# Altium PCB RFM232_V02.PcbDoc
Units mm, origin at the board's own origin, x right, y up, seen from the top; angles counter-clockwise.
Board outline 55.25 x 18.25 mm, 2 copper layers (Top Layer, Bottom Layer); 16 components, 20 nets, 75 pads, 20 vias.
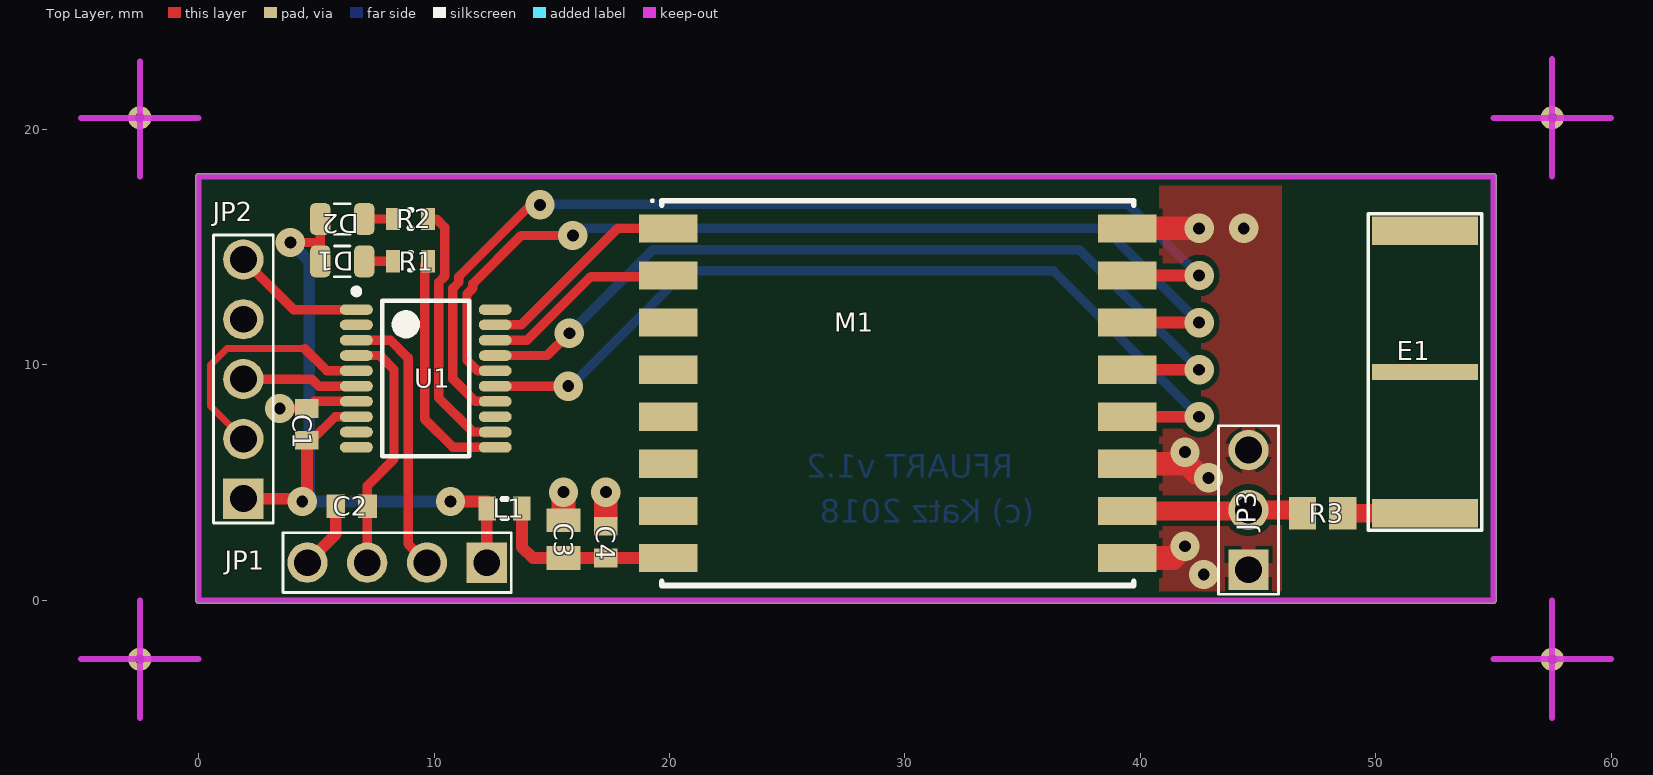
[diagram p0: Top Layer view]
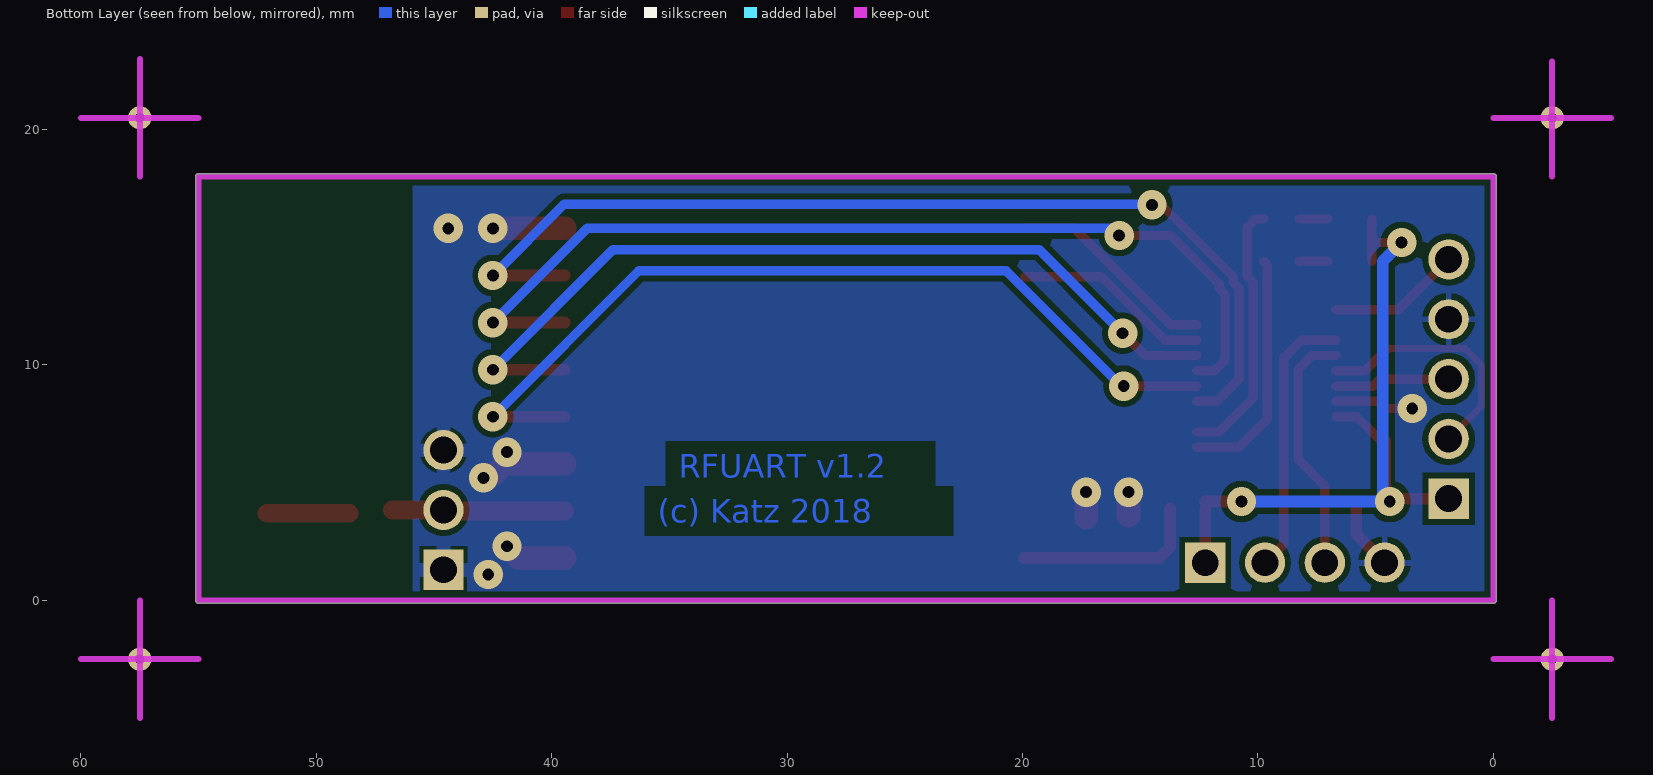
[diagram p1: Bottom Layer view, seen from below]

## Layer stack, top to bottom
Top Solder: solder mask 0.0102, Solder Resist, Dk 3.5
Top Layer: signal copper 0.0356
Dielectric 1: dielectric 0.32, FR-4, Dk 4.8
Bottom Layer: signal copper 0.0356
Bottom Solder: solder mask 0.0102, Solder Resist, Dk 3.5

## Board outline
0,-0.125 cw(c0,0) -0.125,0 -0.125,18 cw(c0,18) 0,18.125 55,18.125 cw(c55,18) 55.125,18 55.125,0 cw(c55,0) 55,-0.125

## Design rules (kind name [scope] priority, off if disabled: settings)
Clearance Clearance_4 [InNamedPolygon('JP21B') vs InNet('NetJP3_2')] p1: gap=0.25 ignorepadtopadclearanceinfootprint=FALSE
Clearance Clearance_3 [InNamedPolygon('JP21B')] p2: gap=0.254 ignorepadtopadclearanceinfootprint=FALSE except(0: Arc-Hole Track-Hole SMDPad-Hole THPad-Hole Via-Hole Fill-Hole Poly-Hole Region-Hole Text-Hole)
Clearance Clearance_2 [All vs InComponent('U1')] p3: gap=0.15 ignorepadtopadclearanceinfootprint=FALSE
Clearance Clearance_1 [InNamedPolygon('GND-T1') Or  InNamedPolygon('GND-B1')] p4: gap=0.25 ignorepadtopadclearanceinfootprint=FALSE
Clearance [All] p5: gap=0.2 ignorepadtopadclearanceinfootprint=FALSE
MinimumSolderMaskSliver [All] p1: minsoldermaskwidth=0.02
PolygonConnect PolygonConnect_1 [InComponent('JP3') vs IsNamedPolygon('JP21B') Or  IsNamedPolygon('JP21B')] p1: connectstyle=Relief reliefconductorwidth=0.6 reliefentries=4 polygonreliefangle="90 Angle" airgapwidth=0.15
PolygonConnect PolygonConnect_4 [IsVia vs IsNamedPolygon('JP21B')] p2: connectstyle=Direct reliefconductorwidth=0.254 reliefentries=4 polygonreliefangle="90 Angle" airgapwidth=0.254
PolygonConnect [All] p3: connectstyle=Relief reliefconductorwidth=0.254 reliefentries=4 polygonreliefangle="90 Angle" airgapwidth=0.254
RoutingVias [All] p1: holewidth=0.4 width=0.8 viastyle="Through Hole" minholewidth=0.711 minwidth=1.27 maxholewidth=0.711 maxwidth=1.27
SilkToSilkClearance [All] p1: silktosilkclearance=0.02
SilkToSolderMaskClearance [IsPad] p1: minsilkscreentomaskgap=0 clearancetoexposedcopper=TRUE
SolderMaskExpansion [All] p1: expansion=0.102
Width [All] p1: maxlimit=2 minlimit=0.2 preferedwidth=0.3
27 further rules are at their usual default settings.

## Components (designator, comment, footprint, x,y, rotation, side; value= is the part's Value field where it differs from the comment)
C1 "100n" CAPC1608X08N 4.6,7.475 r90 top
C2 "100n" CAPC1608X08N 6.5,4 r180 top
C3 "4u7" CAPC2012X11N 15.5,2.6 r90 top
C4 "100n" CAPC1608X08N 17.3,2.475 r90 top
D1 "GREEN" LEDC200X125X80L40N 6.1,14.4 r180 top
D2 "GREEN" LEDC200X125X80L40N 6.1,16.2 r180 top
E1 "C812D5" C812D5 52.1,9.7 r90 top
JP1 "nc" HDRV4W70P254_4X1_889X254H754 12.24,1.6 r180 top
JP2 "Header 5" HDRV5W70P254_5X1_1143X254H754 1.9,4.32 r90 top
JP3 "Header 3" HDRV3W70P254_3X1_635X254H754 44.6,1.3 r90 top
L1 "BLM18AG601" INDC1608X10N 13,3.9 r0 top
M1 "RFM69HW" LGA16_RFM69 29.7,8.8 r0 top
R1 "1k" RESC1608X06N 9,14.4 r0 top
R2 "1k" RESC1608X06N 9,16.2 r0 top
R3 "0" RESC2012X07N 47.75,3.7 r0 top
U1 "STM8L051F3P6" TSOP65P640X110-20N 9.65,9.425 r0 top

## Footprints (in the part's own frame and the unit in brackets; to place one, negate y for a bottom-side part, rotate by r counter-clockwise, add the part's x,y. Pads: shape width x height; smd on the part's side, far side on the other; paste and mask are expansions set on the pad)
C812D5 [mm]
  rect 1.2x4.5 smd: 1(-6,0) 2(6,0)
  rect 0.7x4.5 smd: 3(0,0)
  silkscreen extent -6.73,-2.41 6.73,2.41, body extent -6.73,-2.41 6.73,2.41, height 1.8
CAPC1608X08N [mm] "Chip Capacitor, 2-Leads, Body 1,60x0,80mm, IPC Medium Density"
  rect 0.8x1 smd: 1(-0.675,0) 2(0.675,0)
  body extent -0.87,-0.48 0.87,0.47, height 0.85
CAPC2012X11N [mm] "Chip Capacitor, 2-Leads, Body 2,00x1,25mm, IPC Medium Density"
  rect 1x1.45 smd: 1(-0.8,0) 2(0.8,0)
  body extent -1.1,-0.72 1.1,0.72, height 1.1
HDRV3W70P254_3X1_635X254H754 [mm] "Header, Vertical, 2.54 mm pitch; 0.70 mm lead width, 3 pins, 1 row, 3 pins per row, 6.35 mm L X 2.54 mm W X 7.54 mm H body"
  rect 1.71x1.71 hole 1.14 paste-1.71: 1(0,0)
  round 1.71 hole 1.14 paste-1.71: 2(2.54,0) 3(5.08,0)
  silkscreen extent -1.04,-1.27 6.12,1.27, body extent -0.64,-1.27 5.71,1.27, height 7.54
HDRV4W70P254_4X1_889X254H754 [mm] "Header, Vertical, 2.54 mm pitch; 0.70 mm lead width, 4 pins, 1 row, 4 pins per row, 8.89 mm L X 2.54 mm W X 7.54 mm H body"
  rect 1.71x1.71 hole 1.14 paste-1.71: 1(0,0)
  round 1.71 hole 1.14 paste-1.71: 2(2.54,0) 3(5.08,0) 4(7.62,0)
  silkscreen extent -1.04,-1.27 8.66,1.27, body extent -0.64,-1.27 8.25,1.27, height 7.54
HDRV5W70P254_5X1_1143X254H754 [mm] "Header, Vertical, 2.54 mm pitch; 0.70 mm lead width, 5 pins, 1 row, 5 pins per row, 11.43 mm L X 2.54 mm W X 7.54 mm H body"
  rect 1.71x1.71 hole 1.14 paste-1.71: 1(0,0)
  round 1.71 hole 1.14 paste-1.71: 2(2.54,0) 3(5.08,0) 4(7.62,0) 5(10.16,0)
  silkscreen extent -1.04,-1.27 11.2,1.27, body extent -0.64,-1.27 10.79,1.27, height 7.54
INDC1608X10N [mm] "Chip Inductor, 2-Leads, Body 1,60x0,80mm, IPC Medium Density"
  rect 0.74x1.02 smd: 1(-0.735,0) 2(0.735,0)
  silkscreen extent -0.1,-0.41 0.1,0.41, body extent -0.9,-0.5 0.9,0.5, height 1
LEDC200X125X80L40N [mm] "LED, Chip; 2.00 mm L X 1.25 mm W X 0.80 mm H body"
  rrect51% 0.86x1.35 smd: A(0.935,0) K(-0.935,0)
  silkscreen extent -0.33,-0.65 0.33,0.65, body extent -1,-0.63 1,0.63, height 0.25
LGA16_RFM69 [mm] "LGA, 16-Leads, RFM69HW"
  rect 2.5x1.2 smd: 1(-9.75,7) 2(-9.75,5) 3(-9.75,3) 4(-9.75,1) 5(-9.75,-1) 6(-9.75,-3) 7(-9.75,-5) 8(-9.75,-7) 9(9.75,-7) 10(9.75,-5) 11(9.75,-3) 12(9.75,-1) 13(9.75,1) 14(9.75,3) 15(9.75,5) 16(9.75,7)
  silkscreen extent -10.47,-8.17 10.02,8.22, body extent -9.87,-8.03 9.87,8.03, height 2
RESC1608X06N [mm] "Chip Resistor, 2-Leads, Body 1,60x0,82mm, IPC Medium Density"
  rect 0.6x0.95 smd: 1(-0.75,0) 2(0.75,0)
  silkscreen extent -0.05,-0.38 0.05,0.38, body extent -0.85,-0.48 0.85,0.48, height 0.6
RESC2012X07N [mm] "Chip Resistor, 2-Leads, Body 2,00x1,25mm, IPC Medium Density"
  rect 1.15x1.4 smd: 1(-0.85,0) 2(0.85,0)
  body extent -1.08,-0.7 1.07,0.7, height 0.65
TSOP65P640X110-20N [mm] "TSOP, 20-Leads, Body 6,50x4,40mm, Pitch 0,65mm, IPC Medium Density"
  oval 1.4x0.45 smd: 1(-2.95,2.925) 2(-2.95,2.275) 3(-2.95,1.625) 4(-2.95,0.975) 5(-2.95,0.325) 6(-2.95,-0.325) 7(-2.95,-0.975) 8(-2.95,-1.625) 9(-2.95,-2.275) 10(-2.95,-2.925) 11(2.95,-2.925) 12(2.95,-2.275) 13(2.95,-1.625) 14(2.95,-0.975) 15(2.95,-0.325) 16(2.95,0.325) 17(2.95,0.975) 18(2.95,1.625) 19(2.95,2.275) 20(2.95,2.925)
  silkscreen extent -3.07,-3.3 1.85,3.82, body extent -2.25,-3.3 2.25,3.3, height 1.1

## Part data
C1 C2 C3 C4: library part CAPN
D1 D2: library part DLED
JP1: library part "HEADER 4", "4 Pin Header 2,0 mm, 1x04", Part Field 1=CviLux
JP2: "Header, 5-Pin", LatestRevisionDate=17-Jul-2002, LatestRevisionNote="Re-released for DXP Platform.", Publisher="Altium Limited"
JP3: "Header, 3-Pin", LatestRevisionDate=17-Jul-2002, LatestRevisionNote="Re-released for DXP Platform.", Publisher="Altium Limited"
L1: library part SUPRESOR
M1: library part RFM69HW_V13_2
R1 R2 R3: library part RES

## Free pads (board coordinates)
  round 1 hole 0.4: 2(-2.5,-2.5) 3(57.5,20.5) 4(-2.5,20.5) 5(57.5,-2.5)

## Via types
v1: diameter 1.25, hole 0.5, Top Layer to Bottom Layer, 20 vias

## Nets (pads, with @x,y where several pads share a name; then routed paths per layer and width w, separated by ;. In a path a pad name is that pad's centre, name@x,y a point inside that pad or via, vN(x,y) a via of type N, cw(c..) or ccw(c..) an arc to the next point about the centre after c; other vN are vias at no path point)
GND: C1.2 C2.2 C3.2 C4.2 JP1.4 JP2.4 JP3.1 JP3.3 M1.9 M1.11 M1.16 U1.7 | length 17.3
  Top Layer w0.4: v1(3.45,8.15) C1.2 4.9,8.45 U1.7
  Top Layer w0.5: JP1.4 5.825,2.805 C2.2
  Top Layer w1: C3.2@15.5,3.6 v1(15.5,4.6) ; C4.2@17.3,3.5 v1(17.3,4.6) ; M1.9 41.4,1.8 v1(41.9,2.3) v1@41.8,2.3 ; M1.11 42,5.8 v1@42.4,5.4 ; M1.16 v1(42.5,15.8)
  other v1: 42.7,1.1 42.9,5.2 41.9,6.3 44.4,15.8
IRQ: M1.2 U1.18 | length 8.5
  Top Layer w0.25: M1.2@19.9,13.75 M1.2
  Top Layer w0.4: U1.18 13.95,11.05 16.65,13.75 M1.2@19.9,13.75
MISO: M1.13 U1.17 | length 36.9
  Top Layer w0.4: U1.17 14.8,10.4 v1(15.75,11.35)
  Top Layer w0.5: M1.13 v1(42.5,9.8)
  Bottom Layer w0.4: v1@15.8,11.4 19.3,14.9 37.4,14.9 v1(42.5,9.8)
MOSI: M1.14 U1.16 | length 41.1
  Top Layer w0.4: U1.16 11.85,9.75 11.4,10.2 11.4,13.012 11.65,13.262 11.65,13.45 13.7,15.5 v1(15.9,15.5)
  Top Layer w0.5: M1.14 v1(42.5,11.8)
  Bottom Layer w0.4: v1@15.9,15.8 38.5,15.8 v1(42.5,11.8)
NetC2_1: C2.1 JP1.3 U1.4 | length 10.5
  Top Layer w0.4: U1.4 7.7,10.4 8.3,9.8 8.3,6 7.16,4.86 JP1.3
NetC3_1: C3.1 C4.1 L1.2 M1.8 | length 8
  Top Layer w0.5: L1.2 13.735,2.265 14.2,1.8 C3.1 M1.8
NetD1_K: D1.K R1.1 | length 1.2
  Top Layer w0.4: D1.K R1.1
NetD2_K: D2.K R2.1 | length 1.2
  Top Layer w0.4: D2.K R2.1
NetE1_1: E1.1 R3.2 | length 3.5
  Top Layer w0.8: R3.2 E1.1
NetJP1_2: JP1.2 U1.3 | length 11.5
  Top Layer w0.4: U1.3 8.15,11.05 8.9,10.3 8.9,2.4 JP1.2
NetJP3_2: JP3.2 M1.10 R3.1 | length 7.5
  Top Layer w0.25: JP3.2@44.56,3.8 JP3.2 ; R3.1@46.76,3.84 R3.1
  Top Layer w0.8: M1.10 JP3.2@44.56,3.8 ; JP3.2 R3.1@46.76,3.84
NetR1_2: R1.2 U1.11 | length 10.3
  Top Layer w0.4: R1.2 9.6,14.25 9.6,7.7 10.8,6.5 U1.11
NetR2_2: R2.2 U1.12 | length 11.2
  Top Layer w0.4: R2.2 10.1,16.2 10.45,15.85 10.45,13.759 10.2,13.509 10.2,8.6 11.65,7.15 U1.12
NSS: M1.15 U1.14 | length 44.5
  Top Layer w0.4: U1.14 11.75,8.45 10.8,9.4 10.8,13.261 11.05,13.511 11.05,13.743 14.407,17.1 14.8,17.1 v1(14.5,16.8)
  Top Layer w0.5: M1.15 v1(42.5,13.8)
  Bottom Layer w0.4: v1(14.5,16.8) 14.525,16.825 39.475,16.825 v1(42.5,13.8)
PRG: JP2.5 U1.1 | length 5.7
  Top Layer w0.4: JP2.5 4.03,12.35 U1.1
RFRST: M1.1 U1.19 | length 9
  Top Layer w0.4: U1.19 13.7,11.7 17.8,15.8 M1.1
RXD: JP2.3 U1.6 | length 4.9
  Top Layer w0.4: JP2.3 4.8,9.4 5.1,9.1 U1.6
SCK: M1.12 U1.15 | length 37.5
  Top Layer w0.4: U1.15 v1(15.7,9.1)
  Top Layer w0.5: M1.12 v1(42.5,7.8)
  Bottom Layer w0.4: v1@15.75,9.05 20.7,14 36.3,14 v1(42.5,7.8)
TXD: JP2.2 U1.5 | length 10.6
  Top Layer w0.3: JP2.2 0.5,8.26 0.5,10 1.2,10.7 4.5,10.7
  Top Layer w0.4: 4.5,10.7 5.45,9.75 U1.5
VCC: C1.1 D1.A D2.A JP1.1 JP2.1 L1.1 U1.8 | length 32.7
  Top Layer w0.25: L1.1@12.24,3.875 12.242,3.902 L1.1@12.265,4.2
  Top Layer w0.4: v1(3.9,15.2) 5.165,15.2 ; C1.1 4.8,6.8 5.8,7.8 U1.8 ; D1.A 5.165,15.2 ; D2.A 5.165,15.2
  Top Layer w0.5: JP2.1 4.6,4.32 C1.1 ; v1(10.7,4.2) L1.1@12.265,4.2 ; JP1.1 L1.1@12.24,3.875
  Bottom Layer w0.3: v1(4.4,4.2) v1@4.7,4.5
  Bottom Layer w0.5: v1(3.9,15.2) 4.7,14.4 v1@4.7,4.5 ; v1(4.4,4.2) v1(10.7,4.2)
pads on no net: E1.2 E1.3 M1.3 M1.4 M1.5 M1.6 M1.7 U1.2 U1.9 U1.10 U1.13 U1.20

## Polygon pours and split planes (outlines as drawn)
GND on Top Layer "JP21B" (solid, remove dead copper, pour order 10): 45.9,0 46,0.1 46,18 40.8,18 40.8,0
GND on Bottom Layer "JP21B" (solid, remove dead copper, pour order 8): 0.3,-0.1 45.9,-0.1 45.9,18 0,18

## Keep-outs
Keep-Out Layer:
  lines w0.25: 0,0 0,18 55,18 55,0 0,0
  lines w0.254: -5,-2.5 0,-2.5 ; -5,20.5 0,20.5 ; -2.5,-5 -2.5,0 ; -2.5,18 -2.5,22.9 ; 55,-2.5 60,-2.5 ; 55,20.5 60,20.5 ; 57.5,-5 57.5,0 ; 57.5,18 57.5,23

## Other copper
Bottom Layer:
  text "RFUART v1.2" at 34.6,5.2 h1
  text "(c) Katz 2018" at 35.5,3.3 h1

## Dimensions
0,0 to 0,18 on Mechanical 1
0,0 to 55,0 on Mechanical 1